# EAGLE board PCB (EAGLE 9.7.0)
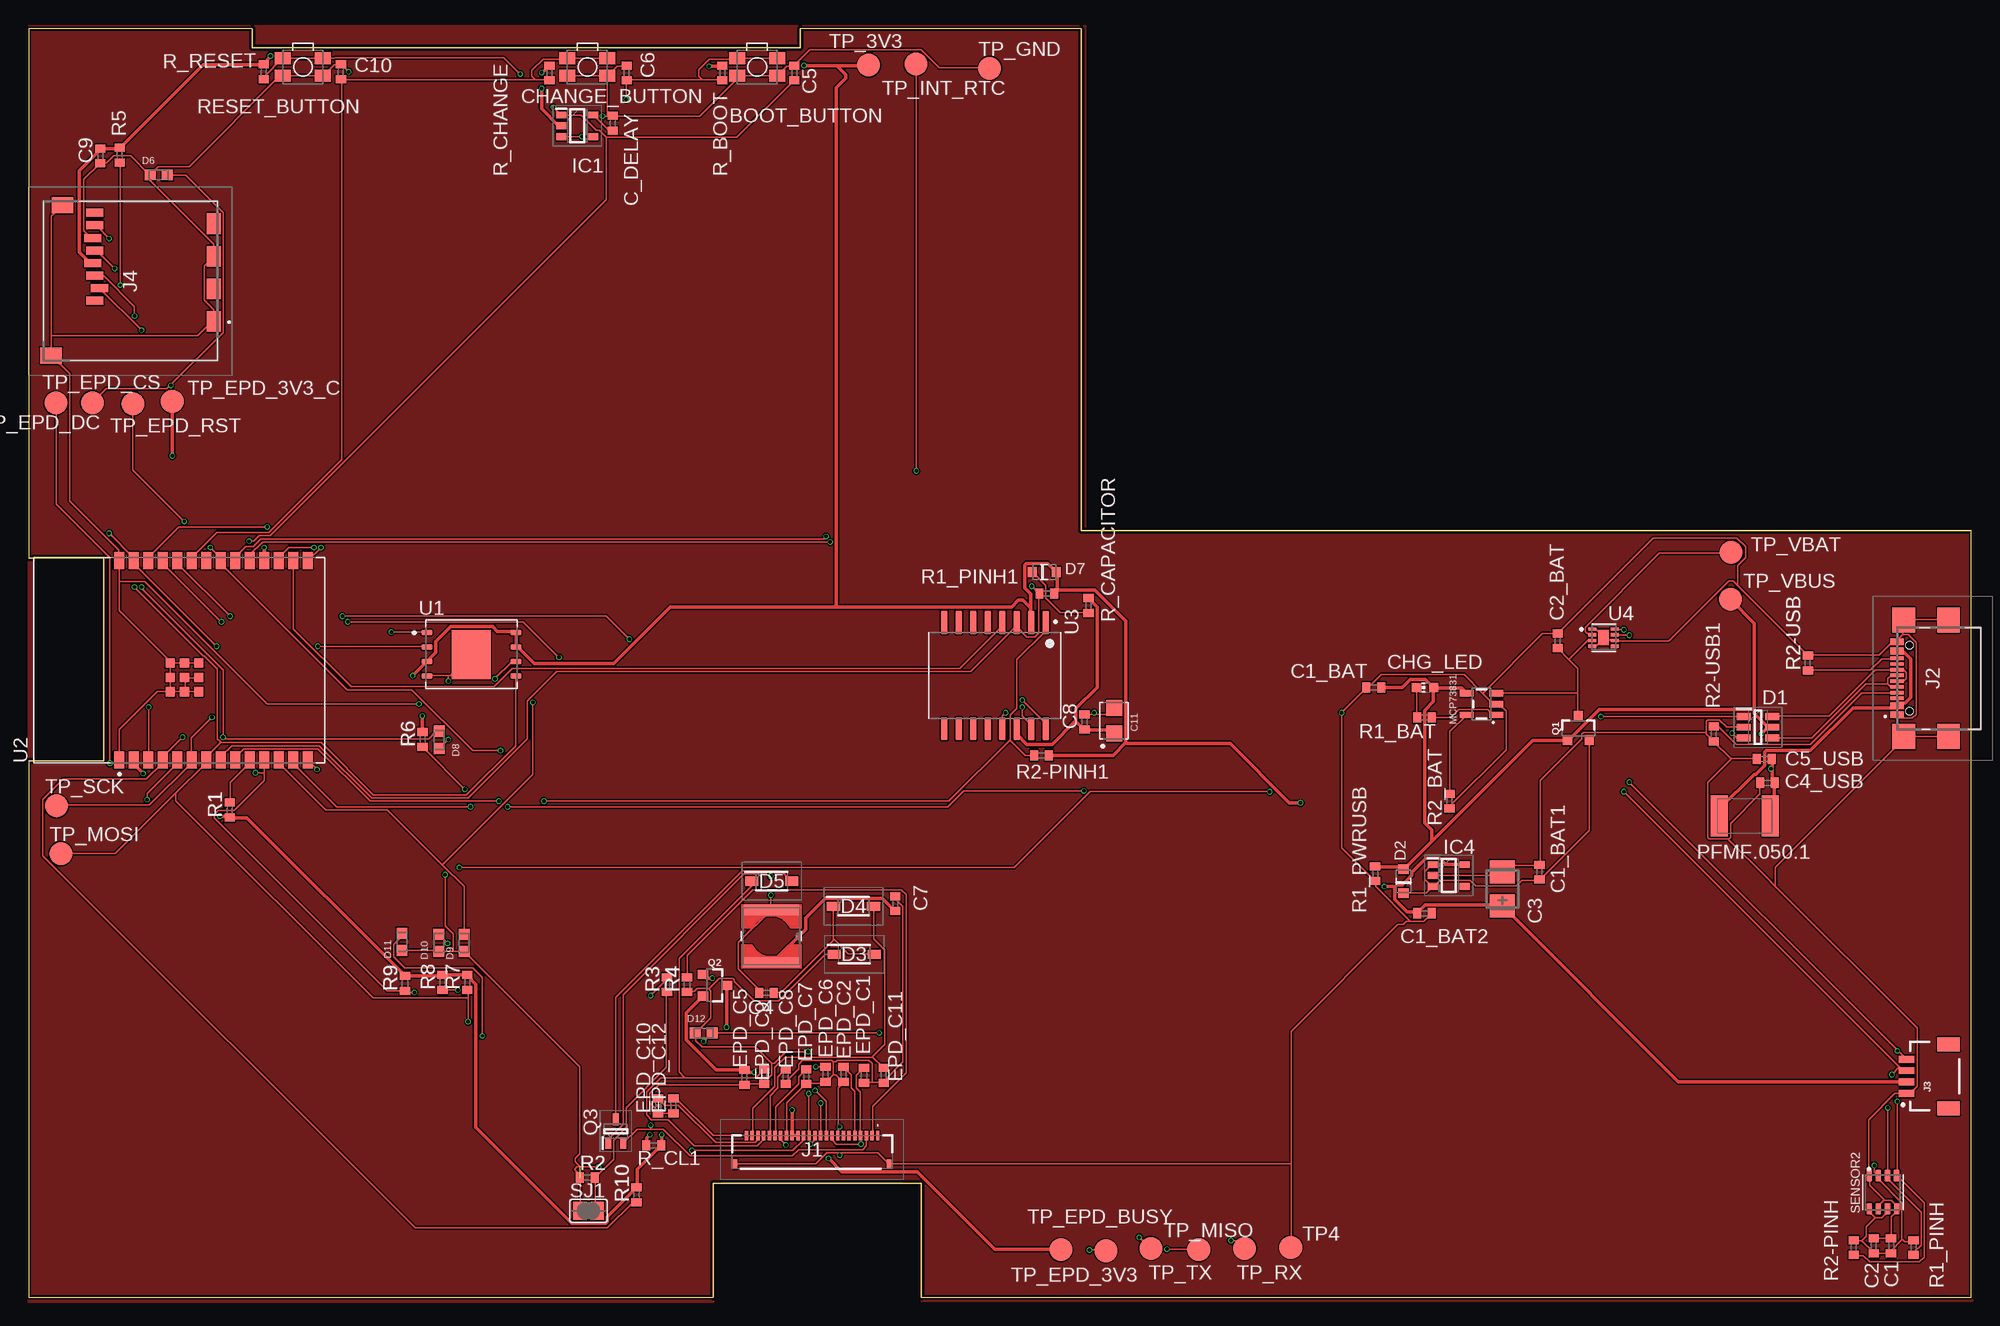
[diagram p0: board, top side]
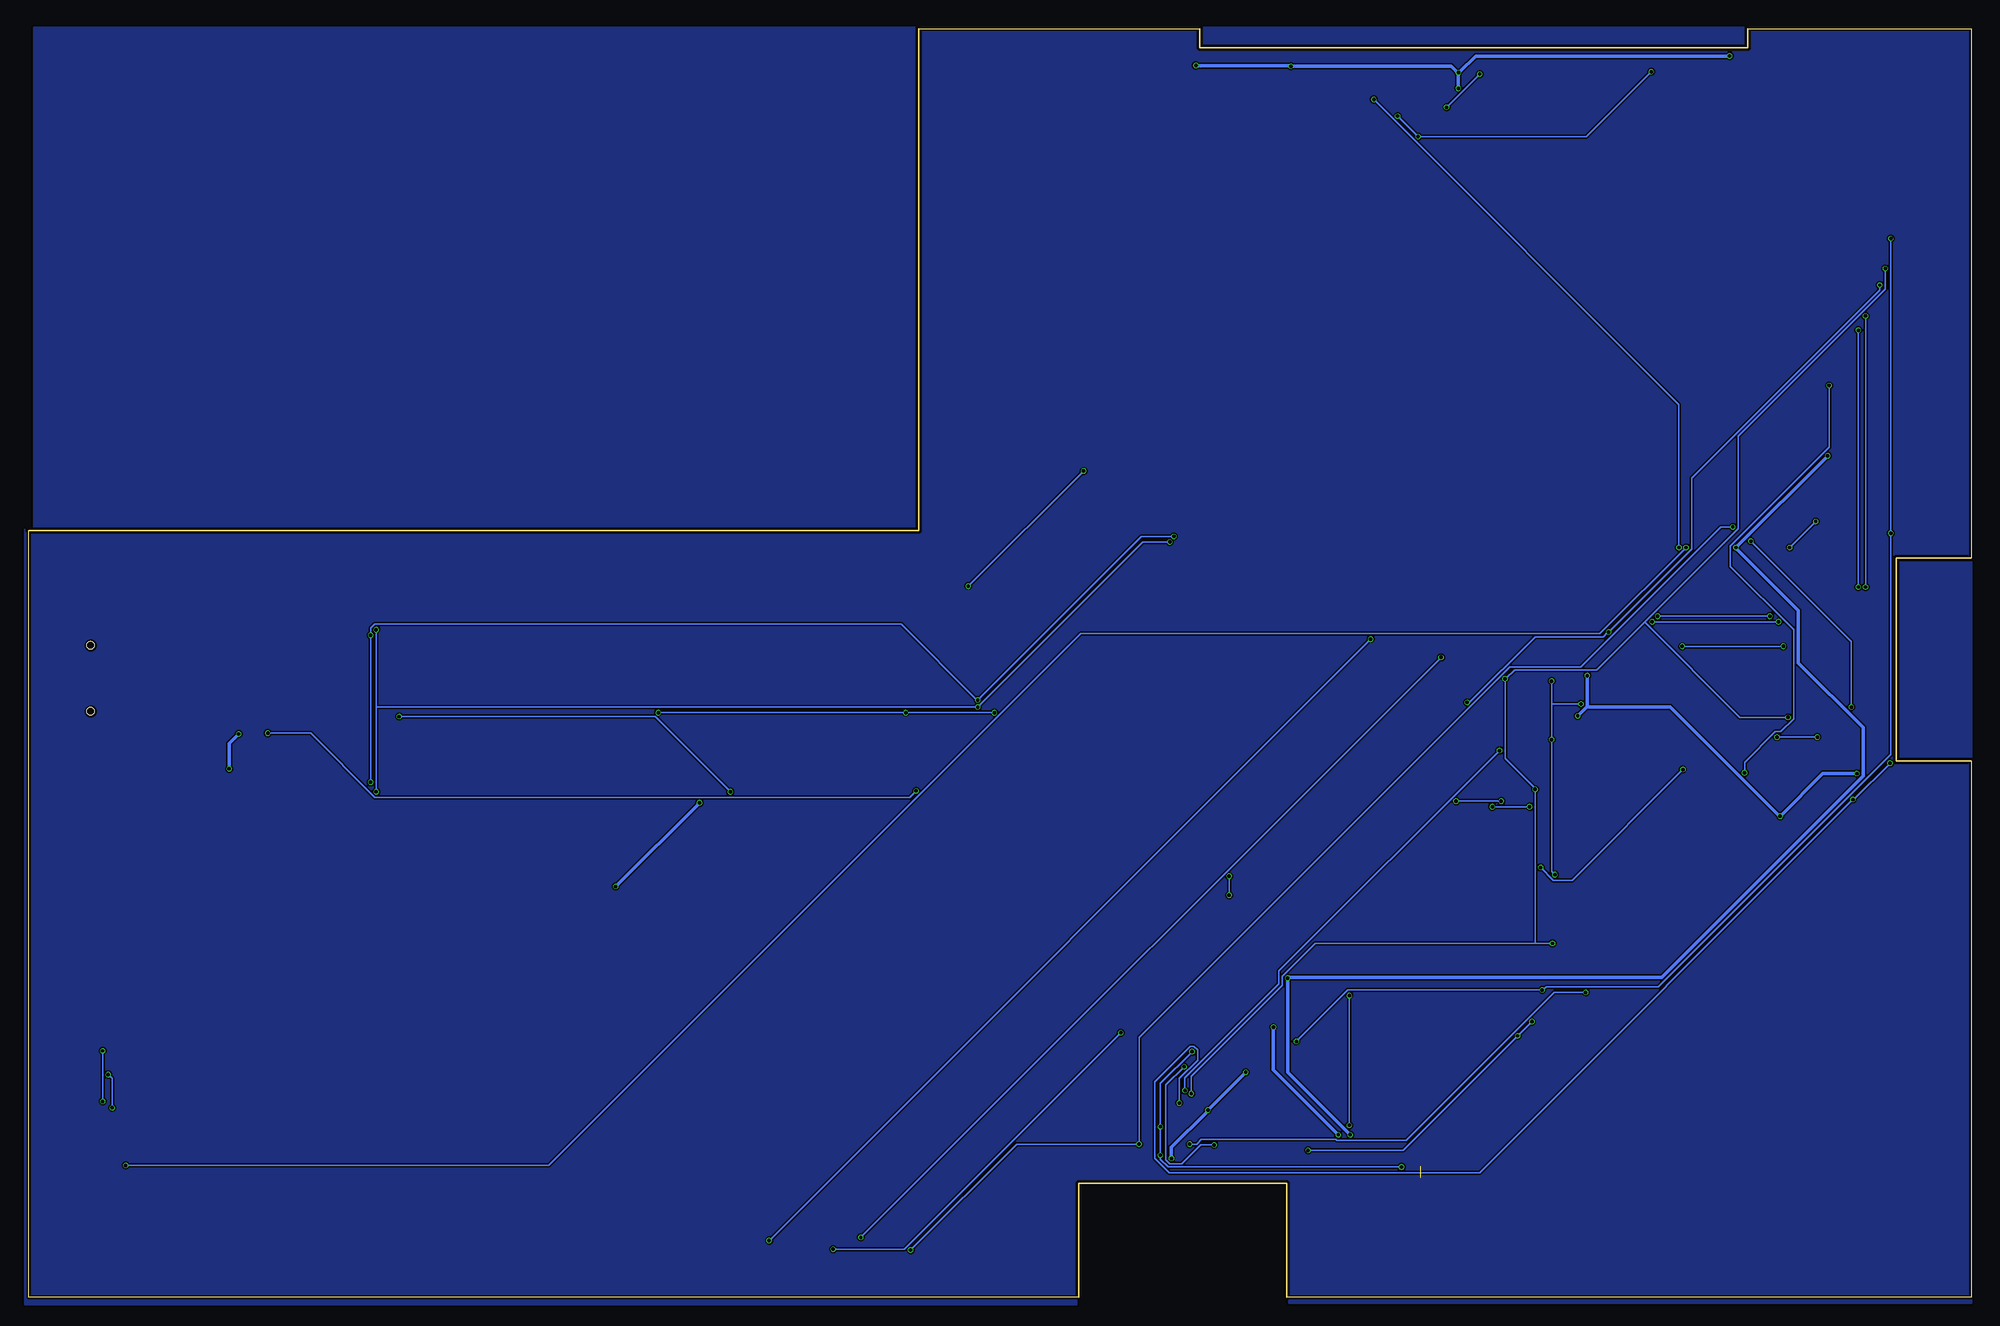
[diagram p1: board, bottom side, seen from below]

Size 170.2 x 111.2 mm. Coordinates in mm from the lower left corner, seen from the top.
Outline: 0,0 60,0 60,10 78.2,10 78.2,0 170.2,0 170.2,67.2 92.2,67.2 92.2,111.2 67.6,111.2 67.6,109.5 19.6,109.5 19.6,111.2 0,111.2 0,64.8 6.6,64.8 6.6,47 0,47 0,0
Copper layers (1*16): Top 0.035mm / dielectric 1.6mm / Bottom 0.035mm
Design rules "jlcpcb-2layers.dru": minimum track width 0.15mm, minimum drill 0.3mm, track to track 5mil, track to pad 5mil, pad to pad 5mil, via to via 5mil, smd to smd 5mil, copper to edge 0.2mm, drill to drill 6mil, minimum pad ring 10mil, minimum via ring 3mil, stop-mask expansion 4mil, vias tented up to drill 0mil, thermal gap 10mil
Net classes: 0 default: width 0.15 mm; 1 POWER: width 0.3 mm

## Footprints (pad centres in the part's own frame; a part is rotated, then mirrored left to right if it is on the bottom)
MYBUTTON = smd 1.4 x 1.05: 1 1.75,0.75; 2 -1.75,0.75; 3 -1.75,-0.75; 4 1.75,-0.75
EAGLE-LTSPICE_C0402 = smd 0.7 x 0.9: 1 -0.65,0; 2 0.65,0
ESP32_WROVER_EAGLE-LTSPICE_C0402 = smd 0.7 x 0.9: 1 -0.65,0; 2 0.65,0
RCL_CT3528 = smd 2 x 2.2: + -1.5,0; - 1.5,0
CAPCP3225X100N = smd 1.4 x 1.4: 1 -1.1,0; 2 1.1,0
ADAFRUIT_CHIP-LED0603 = smd 0.8 x 0.8: A 0,-0.75; C 0,0.75
SOT95P280X145-6N = smd 1.2 x 0.6: 1 -1.25,0.95; 2 -1.25,0; 3 -1.25,-0.95; 4 1.25,-0.95; 5 1.25,0; 6 1.25,0.95
ESP32_WROVER_AVX---SD0805S020S1R0_AVX_SD0805S020S1R0_0 = smd 0.8 x 0.9: 1 -1.05,0; 2 1.05,0
SOD3716X135N = smd 1.15 x 0.8: 1 -1.75,0; 2 1.75,0
DIOC1608X36N = smd 0.97 x 0.94: 1 -0.75,0; 2 0.75,0
SOT95P280X125-5N = smd 0.9 x 0.6: 1 -1.4,0.95; 2 -1.4,0; 3 -1.4,-0.95; 4 1.4,-0.95; 5 1.4,0.95
SOT95P280X120-5N = smd 0.9 x 0.6: 1 -1.4,0.95; 2 -1.4,0; 3 -1.4,-0.95; 4 1.4,-0.95; 5 1.4,0.95
FH34SRJ24S05SH99 = smd 0.3 x 0.8: 1 5.75,1.45; 2 5.25,1.45; 3 4.75,1.45; 4 4.25,1.45; 5 3.75,1.45; 6 3.25,1.45; 7 2.75,1.45; 8 2.25,1.45; 9 1.75,1.45; 10 1.25,1.45; 11 0.75,1.45; 12 0.25,1.45; 13 -0.25,1.45; 14 -0.75,1.45; 15 -1.25,1.45; 16 -1.75,1.45; 17 -2.25,1.45; 18 -2.75,1.45; 19 -3.25,1.45; 20 -3.75,1.45; 21 -4.25,1.45; 22 -4.75,1.45; 23 -5.25,1.45; 24 -5.75,1.45 | smd 0.4 x 0.8: MP1 6.75,-1.05; MP2 -6.75,-1.05
SAMACSYS_PARTS_USB4110GFA = smd 0.3 x 1.15: A1 -3.35,3.678; A4 -2.55,3.678; A5 -1.25,3.678; A6 -0.25,3.678; A7 0.25,3.678; A8 1.25,3.678; A9 2.55,3.678; A12 3.35,3.678; B1 3.05,3.678; B4 2.25,3.678; B5 1.75,3.678; B6 0.75,3.678; B7 -0.75,3.678; B8 -1.75,3.678; B9 -2.25,3.678; B12 -3.05,3.678 | smd 2.18 x 2: MP1 -5.11,-0.827; MP2 5.11,-0.827; MP3 -5.11,3.103; MP4 5.11,3.103 | hole 0.65: -2.89,2.603; 2.89,2.603
JST04_1MM_RA = smd 0.6 x 1.35: 1 -1.5,0; 2 -0.5,0; 3 0.5,0; 4 1.5,0 | smd 1.2 x 2: NC1 2.8,-3.675; NC2 -2.8,-3.675
112ATAARR03ATTEND = smd 1.8 x 1.2: G1 10.6,10.4; G2 4.9,10.4; S1 7.75,10.4; S2 2.05,10.4 | smd 1.4 x 1.9: G3 13.6,-3.85; G4 0.45,-2.85 | smd 0.7 x 1.5: P1 8.8,0; P2 7.7,0.4; P3 6.6,0; P4 5.5,-0.2; P5 4.4,0; P6 3.3,-0.2; P7 2.2,0; P8 1.1,0
IND_4828-WE-TPC_WRE = smd 0.889 x 4.826: 1 -2.286,0 | smd 0.889 x 4.953: 2 2.286,0
ESP32_WROVER_SPARKFUN-IC-POWER_SOT23-5 = smd 0.55 x 1.2: 1 -0.95,-1.3; 2 0,-1.3; 3 0.95,-1.3; 4 0.95,1.3; 5 -0.95,1.3
ESP32C6_VARISTOR_CT/CN1812 = smd 1.5 x 3.6: 1 -2.25,0; 2 2.25,0
ESP32_WROVER_SPARKFUN-DISCRETESEMI_SOT23-3 = smd 0.8 x 0.9: 1 -0.95,-1; 2 0.95,-1; 3 0,1.1
SOT65P210X110-3N = smd 1.05 x 0.5: 1 -1.05,0.65; 2 -1.05,-0.65; 3 1.05,0
ESP32_WROVER_EAGLE-LTSPICE_R0402 = smd 0.7 x 0.9: 1 -0.65,0; 2 0.65,0
ESP32_WROVER_BME680_PSON80P300X300X100-8N = smd 1.016 x 0.5: 1 1.458,1.2; 2 1.458,0.4; 3 1.458,-0.4; 4 1.458,-1.2; 5 -1.458,-1.22; 6 -1.458,-0.4; 7 -1.458,0.4; 8 -1.458,1.2
SJ = smd 1.168 x 1.6: 1 -0.762,0; 2 0.762,0
TP20R = smd 2 x 2: TP 0,0
SON127P600X800X80-9N = smd 0.94 x 0.44: 1 -3.895,1.905; 2 -3.895,0.635; 3 -3.895,-0.635; 4 -3.895,-1.905; 5 3.895,-1.905; 6 3.895,-0.635; 7 3.895,0.635; 8 3.895,1.905 | smd 3.4 x 4.3: 9 0,0
XCVR_ESP32-C6-WROOM-1-N8 = smd 1.5 x 0.9: 1 -8.75,5.26; 2 -8.75,3.99; 3 -8.75,2.72; 4 -8.75,1.45; 5 -8.75,0.18; 6 -8.75,-1.09; 7 -8.75,-2.36; 8 -8.75,-3.63; 9 -8.75,-4.9; 10 -8.75,-6.17; 11 -8.75,-7.44; 12 -8.75,-8.71; 13 -8.75,-9.98; 14 -8.75,-11.25; 15 8.75,-11.25; 16 8.75,-9.98; 17 8.75,-8.71; 18 8.75,-7.44; 19 8.75,-6.17; 20 8.75,-4.9; 21 8.75,-3.63; 22 8.75,-2.36; 23 8.75,-1.09; 24 8.75,0.18; 25 8.75,1.45; 26 8.75,2.72; 27 8.75,3.99; 28 8.75,5.26 | smd 0.8 x 0.8: 29_1 -2.755,0.79; 29_2 -1.505,0.79; 29_3 -0.255,0.79; 29_4 -2.755,-0.46; 29_5 -1.505,-0.46; 29_6 -0.255,-0.46; 29_7 -2.755,-1.71; 29_8 -1.505,-1.71; 29_9 -0.255,-1.71
SOIC127P1032X265-16N = smd 2.05 x 0.59: 1 -4.655,4.445; 2 -4.655,3.175; 3 -4.655,1.905; 4 -4.655,0.635; 5 -4.655,-0.635; 6 -4.655,-1.905; 7 -4.655,-3.175; 8 -4.655,-4.445; 9 4.655,-4.445; 10 4.655,-3.175; 11 4.655,-1.905; 12 4.655,-0.635; 13 4.655,0.635; 14 4.655,1.905; 15 4.655,3.175; 16 4.655,4.445
SON50P200X200X80-9N = smd 0.76 x 0.27: 1 -0.985,0.75; 2 -0.985,0.25; 3 -0.985,-0.25; 4 -0.985,-0.75; 5 0.985,-0.75; 6 0.985,-0.25; 7 0.985,0.25; 8 0.985,0.75 | smd 0.9 x 1.3: 9 0,0

## Placement (x,y rotation side)
BOOT_BUTTON  BUTTON_CUSYOMV1  [MYBUTTON]  63.83,107.83 180 top
C1  100nF  [EAGLE-LTSPICE_C0402]  163.16,4.53 90 top
C1_BAT  4.7uF  [EAGLE-LTSPICE_C0402]  117.85,53.45 180 top
C1_BAT1  4.7uF  [ESP32_WROVER_EAGLE-LTSPICE_C0402]  132.35,37.27 90 top
C1_BAT2  4.7uF  [ESP32_WROVER_EAGLE-LTSPICE_C0402]  122.29,33.67 0 top
C2  100nF  [EAGLE-LTSPICE_C0402]  161.64,4.53 90 top
C2_BAT  4.7uF  [EAGLE-LTSPICE_C0402]  133.96,57.55 90 top
C3  100uF TANT  [RCL_CT3528]  129.11,35.8 90 top
C4  4.7uF/25V  [EAGLE-LTSPICE_C0402]  64.65,26.69 180 top
C4_USB  100nF  [EAGLE-LTSPICE_C0402]  152.33,45.1 180 top
C5  1uF  [EAGLE-LTSPICE_C0402]  67.08,107.31 90 top
C5_USB  4.7uF  [EAGLE-LTSPICE_C0402]  152.05,47.18 180 top
C6  100nF  [EAGLE-LTSPICE_C0402]  52.41,107.31 90 top
C7  10uF  [EAGLE-LTSPICE_C0402]  75.92,34.51 90 top
C8  100nF  [EAGLE-LTSPICE_C0402]  92.5,50.43 90 top
C9  100nF  [EAGLE-LTSPICE_C0402]  6.28,100.03 90 top
C10  100nF  [EAGLE-LTSPICE_C0402]  27.36,107.41 90 top
C11  CPH3225A  [CAPCP3225X100N]  95.1,50.54 90 top
C_DELAY  100nF  [EAGLE-LTSPICE_C0402]  51.17,102.89 90 top
CHANGE_BUTTON  BUTTON_CUSYOMV1  [MYBUTTON]  48.96,107.83 180 top
CHG_LED  [ADAFRUIT_CHIP-LED0603]  122.34,53.45 90 top
D1  USBLC6-2SC6Y  [SOT95P280X145-6N]  151.5,49.97 0 top
D2  ESP32_WROVER_AVX---SD0805S020S1R0_AVX_SD0805S020S1R0_0_0AVX_SD0805S020S1R0_0_0  [ESP32_WROVER_AVX---SD0805S020S1R0_AVX_SD0805S020S1R0_0]  120.44,36.48 90 top
D3  MBR0530  [SOD3716X135N]  72.33,30.08 0 top
D4  MBR0530  [SOD3716X135N]  72.27,34.28 0 top
D5  MBR0530  [SOD3716X135N]  65.11,36.48 0 top
D6  PGB1010603MR  [DIOC1608X36N]  11.4,98.37 0 top
D7  ESP32_WROVER_AVX---SD0805S020S1R0_AVX_SD0805S020S1R0_0_0AVX_SD0805S020S1R0_0_0  [ESP32_WROVER_AVX---SD0805S020S1R0_AVX_SD0805S020S1R0_0]  88.99,63.58 0 top
D8  PGB1010603MR  [DIOC1608X36N]  35.98,48.87 90 top
D9  PGB1010603MR  [DIOC1608X36N]  38.16,31.07 90 top
D10  PGB1010603MR  [DIOC1608X36N]  35.94,31.07 90 top
D11  PGB1010603MR  [DIOC1608X36N]  32.72,31.17 90 top
D12  PGB1010603MR  [DIOC1608X36N]  59.15,23.18 0 top
EPD_C1  1uF/50V  [EAGLE-LTSPICE_C0402]  73.19,19.45 90 top
EPD_C2  1uF/50V  [EAGLE-LTSPICE_C0402]  71.4,19.55 90 top
EPD_C5  0.1uF/50v  [EAGLE-LTSPICE_C0402]  62.71,19.29 90 top
EPD_C6  1uF/50V  [EAGLE-LTSPICE_C0402]  69.81,19.55 90 top
EPD_C7  1uF/50V  [EAGLE-LTSPICE_C0402]  68.12,19.35 90 top
EPD_C8  1uF/50V  [EAGLE-LTSPICE_C0402]  66.33,19.35 90 top
EPD_C9  1uF/50V  [EAGLE-LTSPICE_C0402]  64.44,19.35 90 top
EPD_C10  1uF/50V  [EAGLE-LTSPICE_C0402]  55.15,16.79 90 top
EPD_C11  1uF/50V  [EAGLE-LTSPICE_C0402]  74.91,19.47 90 top
EPD_C12  1uF/50V  [EAGLE-LTSPICE_C0402]  56.49,16.79 90 top
IC1  BD5229G-TR  [SOT95P280X125-5N]  48.07,102.67 0 top
IC4  XC6220A331MR-G  [SOT95P280X120-5N]  124.41,36.97 0 top
J1  FH34SRJ-24S-0.5SH_99_  [FH34SRJ24S05SH99]  68.64,12.74 0 top
J2  SAMACSYS_PARTS_USB4110-GF-A  [SAMACSYS_PARTS_USB4110GFA]  167.36,54.26 90 top
J3  QWIIC_RIGHT_ANGLE  [JST04_1MM_RA]  164.51,19.38 90 top
J4  112A-TAAR-R03_ATTEND  [112ATAARR03ATTEND]  5.82,96.15 270 top
L1  68uH  [IND_4828-WE-TPC_WRE]  65.07,31.65 270 top
MCP73831  ESP32_WROVER_SPARKFUN-IC-POWER_MCP73831  [ESP32_WROVER_SPARKFUN-IC-POWER_SOT23-5]  127.28,51.99 90 top
PFMF.050.1  ESP32C6_VARISTORCN1812  [ESP32C6_VARISTOR_CT/CN1812]  150.34,42.2 0 top
Q1  20V/4.2A/52mΩ/1.4W  [ESP32_WROVER_SPARKFUN-DISCRETESEMI_SOT23-3]  135.76,49.86 0 top
Q2  20V/4.2A/52mΩ/1.4W  [ESP32_WROVER_SPARKFUN-DISCRETESEMI_SOT23-3]  60.08,27.36 270 top
Q3  SI1308EDL-T1-GE3  [SOT65P210X110-3N]  51.44,14.58 90 top
R1  10k  [ESP32_WROVER_EAGLE-LTSPICE_R0402]  17.62,42.71 90 top
R1_BAT  200  [ESP32_WROVER_EAGLE-LTSPICE_R0402]  122.28,50.83 0 top
R1_PINH  10K  [ESP32_WROVER_EAGLE-LTSPICE_R0402]  165.13,4.37 90 top
R1_PINH1  10K  [ESP32_WROVER_EAGLE-LTSPICE_R0402]  89.21,61.69 0 top
R1_PWRUSB  100K  [ESP32_WROVER_EAGLE-LTSPICE_R0402]  117.96,37.14 90 top
R2  2.2  [ESP32_WROVER_EAGLE-LTSPICE_R0402]  48.94,10.51 0 top
R2-PINH  10K  [ESP32_WROVER_EAGLE-LTSPICE_R0402]  159.89,4.37 90 top
R2-PINH1  10K  [ESP32_WROVER_EAGLE-LTSPICE_R0402]  88.73,47.49 0 top
R2-USB  5k1  [ESP32_WROVER_EAGLE-LTSPICE_R0402]  155.87,55.6 90 top
R2-USB1  5K1  [ESP32_WROVER_EAGLE-LTSPICE_R0402]  147.63,49.37 90 top
R2_BAT  2K  [ESP32_WROVER_EAGLE-LTSPICE_R0402]  124.47,43.49 90 top
R3  0.47  [ESP32_WROVER_EAGLE-LTSPICE_R0402]  55.94,27.41 90 top
R4  10K  [ESP32_WROVER_EAGLE-LTSPICE_R0402]  57.68,27.41 90 top
R5  10K  [ESP32_WROVER_EAGLE-LTSPICE_R0402]  8,100.11 90 top
R6  10K  [ESP32_WROVER_EAGLE-LTSPICE_R0402]  34.52,48.91 90 top
R7  10K  [ESP32_WROVER_EAGLE-LTSPICE_R0402]  38.44,27.61 90 top
R8  10K  [ESP32_WROVER_EAGLE-LTSPICE_R0402]  36.26,27.61 90 top
R9  10K  [ESP32_WROVER_EAGLE-LTSPICE_R0402]  32.98,27.51 90 top
R10  10K  [ESP32_WROVER_EAGLE-LTSPICE_R0402]  53.26,9.01 90 top
R_BOOT  10k  [ESP32_WROVER_EAGLE-LTSPICE_R0402]  60.78,107.31 90 top
R_CAPACITOR  15  [ESP32_WROVER_EAGLE-LTSPICE_R0402]  92.86,60.64 90 top
R_CHANGE  10k  [ESP32_WROVER_EAGLE-LTSPICE_R0402]  45.63,107.31 90 top
R_CL1  10K  [ESP32_WROVER_EAGLE-LTSPICE_R0402]  54.78,13.33 0 top
R_RESET  10k  [ESP32_WROVER_EAGLE-LTSPICE_R0402]  20.6,107.41 90 top
RESET_BUTTON  BUTTON_CUSYOMV1  [MYBUTTON]  24.04,107.83 180 top
SENSOR2  ESP32_WROVER_BME680_BME680  [ESP32_WROVER_BME680_PSON80P300X300X100-8N]  162.44,9.22 90 top
SJ1  [SJ]  49.06,7.59 0 top
TP4  TPTP20R  [TP20R]  110.57,4.39 0 top
TP_3V3  TPTP20R  [TP20R]  73.59,107.99 0 top
TP_EPD_3V3  TPTP20R  [TP20R]  90.44,4.19 0 top
TP_EPD_3V3_C  TPTP20R  [TP20R]  12.59,78.51 0 top
TP_EPD_BUSY  TPTP20R  [TP20R]  94.37,4.09 0 top
TP_EPD_CS  TPTP20R  [TP20R]  5.59,78.41 0 top
TP_EPD_DC  TPTP20R  [TP20R]  2.39,78.39 0 top
TP_EPD_RST  TPTP20R  [TP20R]  9.14,78.31 0 top
TP_GND  TPTP20R  [TP20R]  84.19,107.71 0 top
TP_INT_RTC  TPTP20R  [TP20R]  77.74,108.09 0 top
TP_MISO  TPTP20R  [TP20R]  102.51,4.19 0 top
TP_MOSI  TPTP20R  [TP20R]  2.83,38.89 0 top
TP_RX  TPTP20R  [TP20R]  106.53,4.29 0 top
TP_SCK  TPTP20R  [TP20R]  2.45,43.09 0 top
TP_TX  TPTP20R  [TP20R]  98.31,4.29 0 top
TP_VBAT  TPTP20R  [TP20R]  149.15,65.29 0 top
TP_VBUS  TPTP20R  [TP20R]  149.09,61.19 0 top
U1  W25Q512JVEIQ  [SON127P600X800X80-9N]  38.79,56.36 0 top
U2  ESP32-C6-WROOM-1-N8  [XCVR_ESP32-C6-WROOM-1-N8]  13.2,55.84 90 top
U3  DS3231SN#  [SOIC127P1032X265-16N]  84.65,54.5 270 top
U4  MAX17048G+T10  [SON50P200X200X80-9N]  137.97,57.82 0 top

## Library data of the parts
BOOT_BUTTON CHANGE_BUTTON CHG_LED PFMF.050.1 RESET_BUTTON SJ1 TP4 TP_3V3 TP_EPD_3V3 TP_EPD_3V3_C TP_EPD_BUSY TP_EPD_CS TP_EPD_DC TP_EPD_RST TP_GND TP_INT_RTC TP_MISO TP_MOSI TP_RX TP_SCK TP_TX TP_VBAT TP_VBUS = DeskAssistant_v19_v1
C1 C1_BAT C1_BAT1 C1_BAT2 C2 C2_BAT C4 C4_USB C5 C5_USB C6-C10 C_DELAY EPD_C1 EPD_C2 EPD_C5-EPD_C12 = DeskAssistant_v19_v1; SPICEMODEL: NONE; SPICEPREFIX: C
C3 = DeskAssistant_v19_v1; SPICEPREFIX: C
C11 = DeskAssistant_v19_v1; AVAILABILITY: Not in stock; CHECK_PRICES: https://www.snapeda.com/parts/CPH3225A/Seiko+Instruments/view-part/?ref=eda; DESCRIPTION: 11 mF (EDLC) Supercapacitor 3.3 V 1210 (3225 Metric) - -; MF: Seiko Instruments; MP: CPH3225A; PACKAGE: 1210 Seiko; PRICE: None; PURCHASE-URL: https://www.snapeda.com/api/url_track_click_mouser/?unipart_id=562593&manufacturer=Seiko Instruments&part_name=CPH3225A&search_term=None; SNAPEDA_LINK: https://www.snapeda.com/parts/CPH3225A/Seiko+Instruments/view-part/?ref=snap
D1 = DeskAssistant_v19_v1; AVAILABILITY: In Stock; CHECK_PRICES: https://www.snapeda.com/parts/USBLC6-2SC6Y/STMicroelectronics/view-part/?ref=eda; DESCRIPTION: 17V Clamp 5A (8/20µs) Ipp Tvs Diode Surface Mount SOT-23-6; MF: STMicroelectronics; MP: USBLC6-2SC6Y; PACKAGE: SOT-23-6 STMicroelectronics; PRICE: None; SNAPEDA_LINK: https://www.snapeda.com/parts/USBLC6-2SC6Y/STMicroelectronics/view-part/?ref=snap
D2 D7 = DeskAssistant_v19_v1; CENTROID_NOT_SPECIFIED: No; DATASHEET: http://datasheets.avx.com/schottky.pdf; DIGIKEY_DESCRIPTION: DIODE SCHOTTKY 20V 1A 0805; DIGIKEY_PART_NUMBER: 478-7800-1-ND; LEAD_FREE: yes; MF: AVX; MOUSER_PART_NUMBER: 581-SD0805S020S1R0; PACKAGE: 0805 (2012 metric); PREFIX: D; ROHS: yes; TEMPERATURE_RANGE_HIGH: +125°C; TEMPERATURE_RANGE_LOW: -55°C
D3-D5 = DeskAssistant_v19_v1; AVAILABILITY: In Stock; CHECK_PRICES: https://www.snapeda.com/parts/MBR0530/Onsemi/view-part/?ref=eda; DESCRIPTION: Diode Schottky 30 V 500mA Surface Mount SOD-123; MF: ON Semiconductor; MP: MBR0530; PACKAGE: SOD-123-2 ON Semiconductor; PRICE: None; PURCHASE-URL: https://www.snapeda.com/api/url_track_click_mouser/?unipart_id=179458&manufacturer=ON Semiconductor&part_name=MBR0530&search_term=None; SNAPEDA_LINK: https://www.snapeda.com/parts/MBR0530/Onsemi/view-part/?ref=snap
D6 D8-D12 = DeskAssistant_v19_v1; AVAILABILITY: In Stock; CHECK_PRICES: https://www.snapeda.com/parts/PGB1010603MR/Littelfuse/view-part/?ref=eda; DESCRIPTION: 150V (Typ) Clamp - Ipp Tvs Diode Surface Mount 0603 (1608 Metric); MF: Littelfuse Inc.; MP: PGB1010603MR; PACKAGE: 0603 Littelfuse Inc.; PRICE: None; PURCHASE-URL: https://www.snapeda.com/api/url_track_click_mouser/?unipart_id=5659453&manufacturer=Littelfuse Inc.&part_name=PGB1010603MR&search_term=None; SNAPEDA_LINK: https://www.snapeda.com/parts/PGB1010603MR/Littelfuse/view-part/?ref=snap
IC1 = DeskAssistant_v19_v1; DESCRIPTION: Voltage Detector with Adjustable Delay Time: CMOS processes are utilized to develop high precision, low current consumption CMOS reset ICs that allow arbitrary setting of the delay time. The extensive lineup includes both Nch Open Drain and CMOS output types in a wide range of detection voltages (from 2.3V to 6.0V, in 0.1V steps), enabling selection of the ideal solution based on customer requirements. In addition, the entire series is of course both lead-free and RoHS-compliant.; HEIGHT: 1.25mm; MANUFACTURER_NAME: ROHM Semiconductor; MANUFACTURER_PART_NUMBER: BD5229G-TR; MOUSER_PART_NUMBER: 755-BD5229G-TR; MOUSER_PRICE-STOCK: https://www.mouser.co.uk/ProductDetail/ROHM-Semiconductor/BD5229G-TR?qs=4kLU8WoGk0vvnhrrYwdszw%3D%3D
IC4 = DeskAssistant_v19_v1; DESCRIPTION: LDO Voltage Regulators; HEIGHT: 1.2mm; MANUFACTURER_NAME: Torex; MANUFACTURER_PART_NUMBER: XC6220A331MR-G; MOUSER_PART_NUMBER: 865-XC6220A331MR-G; MOUSER_PRICE-STOCK: https://www.mouser.co.uk/ProductDetail/Torex-Semiconductor/XC6220A331MR-G?qs=AsjdqWjXhJ8ZSWznL1J0gg%3D%3D
J1 = DeskAssistant_v19_v1; DESCRIPTION: 24 Position FFC, FPC Connector Contacts, Top and Bottom 0.020" (0.50mm) Surface Mount, Right Angle; HEIGHT: 1.1mm; MANUFACTURER_NAME: Hirose; MANUFACTURER_PART_NUMBER: FH34SRJ-24S-0.5SH(99); MOUSER_PART_NUMBER: 798-FH34SRJ24S05SH99; MOUSER_PRICE-STOCK: https://www.mouser.co.uk/ProductDetail/Hirose-Connector/FH34SRJ-24S-0.5SH99?qs=vcbW%252B4%252BSTIpKBl5ap9J8Fw%3D%3D
J2 = DeskAssistant_v19_v1; DESCRIPTION: CONN USB 2.0 TYPE-C R/A SMT; HEIGHT: 3.26mm; MANUFACTURER_NAME: GCT (GLOBAL CONNECTOR TECHNOLOGY); MANUFACTURER_PART_NUMBER: USB4110-GF-A; MOUSER_PART_NUMBER: 640-USB4110-GF-A; MOUSER_PRICE-STOCK: https://www.mouser.co.uk/ProductDetail/GCT/USB4110-GF-A?qs=KUoIvG%2F9IlYiZvIXQjyJeA%3D%3D
J3 = DeskAssistant_v19_v1; PROD_ID: CONN-13694
J4 = DeskAssistant_v19_v1; DESCRIPTION: Micro SD Card Socket, Push-Push Type, Top Mount, SMT, H=1.83mm, 10u; HEIGHT: 1.9mm; MANUFACTURER_NAME: ATTEND; MANUFACTURER_PART_NUMBER: 112A-TAAR-R03 ATTEND
L1 = DeskAssistant_v19_v1; COPYRIGHT: Copyright (C) 2024 Ultra Librarian. All rights reserved.; MANUFACTURER_PART_NUMBER: 744043680; MFR_NAME: Wurth Electronics
MCP73831 = DeskAssistant_v19_v1; PROD_ID: IC-09995
Q1 Q2 = DeskAssistant_v19_v1; PROD_ID: TRAN-14388
Q3 = DeskAssistant_v19_v1; AVAILABILITY: In Stock; CHECK_PRICES: https://www.snapeda.com/parts/SI1308EDL-T1-GE3/Vishay+Siliconix/view-part/?ref=eda; DESCRIPTION: Si1308EDL-T1-GE3 N-channel MOSFET Transistor, 1.5 A, 30 V, 3-Pin SC-70 | Siliconix / Vishay SI1308EDL-T1-GE3; MF: Vishay Siliconix; MP: SI1308EDL-T1-GE3; PACKAGE: SOT-323 Vishay Semiconductor; PRICE: None; PURCHASE-URL: https://www.snapeda.com/api/url_track_click_mouser/?unipart_id=274603&manufacturer=Vishay Siliconix&part_name=SI1308EDL-T1-GE3&search_term=None; SNAPEDA_LINK: https://www.snapeda.com/parts/SI1308EDL-T1-GE3/Vishay+Siliconix/view-part/?ref=snap
R1 R1_BAT R1_PINH R1_PINH1 R1_PWRUSB R2 R2-PINH R2-PINH1 R2-USB R2_BAT R3-R10 R_BOOT R_CAPACITOR R_CHANGE R_CL1 R_RESET = DeskAssistant_v19_v1; SPICEMODEL: NONE; SPICEPREFIX: R
R2-USB1 = DeskAssistant_v19_v1; SPICEMODEL: NONE; SPICEPREFIX: R2-USB1
SENSOR2 = DeskAssistant_v19_v1; AVAILABILITY: Unavailable; DESCRIPTION: Integrated Environmental Unit; MF: Bosch Sensortec; MP: BME680; PACKAGE: LGA-8 Bosch Tools; PRICE: None
U1 = DeskAssistant_v19_v1; AVAILABILITY: In Stock; CHECK_PRICES: https://www.snapeda.com/parts/W25Q512JVEIQ/Winbond+Electronics/view-part/?ref=eda; DESCRIPTION: FLASH - NOR Memory IC 512Mb (64M x 8) SPI - Quad I/O 133 MHz 8-WSON (8x6); MF: Winbond Electronics; MP: W25Q512JVEIQ; PACKAGE: Package; PRICE: None; SNAPEDA_LINK: https://www.snapeda.com/parts/W25Q512JVEIQ/Winbond+Electronics/view-part/?ref=snap
U2 = DeskAssistant_v19_v1; AVAILABILITY: In Stock; CHECK_PRICES: https://www.snapeda.com/parts/ESP32-C6-WROOM-1-N8/Espressif+Systems/view-part/?ref=eda; DESCRIPTION: Multiprotocol Modules ESP32-C6 module, Wi-Fi 6 in 2.4 GHz band, Bluetooth 5, Zigbee 3.0 and Thread. ESP34-WROOM Compatible - ENGINEERING SAMPLE; MF: Espressif Systems; MP: ESP32-C6-WROOM-1-N8; PACKAGE: None; PRICE: None; SNAPEDA_LINK: https://www.snapeda.com/parts/ESP32-C6-WROOM-1-N8/Espressif+Systems/view-part/?ref=snap
U3 = DeskAssistant_v19_v1; AVAILABILITY: In Stock; CHECK_PRICES: https://www.snapeda.com/parts/DS3231SN%23/Analog+Devices/view-part/?ref=eda; DESCRIPTION: Extremely Accurate I²C-Integrated RTC/TCXO/Crystal; MF: Analog Devices; MP: DS3231SN#; PACKAGE: SOIC-16 Maxim; PRICE: None; PURCHASE-URL: https://www.snapeda.com/api/url_track_click_mouser/?unipart_id=99048&manufacturer=Analog Devices&part_name=DS3231SN#&search_term=None; SNAPEDA_LINK: https://www.snapeda.com/parts/DS3231SN%23/Analog+Devices/view-part/?ref=snap
U4 = DeskAssistant_v19_v1; AVAILABILITY: In Stock; CHECK_PRICES: https://www.snapeda.com/parts/MAX17048G+T10/Analog+Devices/view-part/?ref=eda; DESCRIPTION: 3µA 1-Cell/2-Cell Fuel Gauge with ModelGauge; MF: Analog Devices; MP: MAX17048G+T10; PACKAGE: TDFN-8 Maxim; PRICE: None; PURCHASE-URL: https://www.snapeda.com/api/url_track_click_mouser/?unipart_id=329239&manufacturer=Analog Devices&part_name=MAX17048G+T10&search_term=None; SNAPEDA_LINK: https://www.snapeda.com/parts/MAX17048G+T10/Analog+Devices/view-part/?ref=snap

## Nets
3V3 [POWER]: C1_BAT2.1 C3.+ C9.2 D7.2 IC1.2 IC4.5 J3.2 J4.P4 Q2.3 R1.1 R1_PINH1.2 R2-PINH1.2 R5.2 R6.2 R7.2 R8.2 R9.2 R10.2 R_BOOT.2 R_CHANGE.2 R_CL1.2 R_RESET.2 TP_3V3.TP U1.3 U1.7 U1.8 U2.2 U3.2
32KHZ: R2-PINH1.1 U2.9 U3.1
DN: D1.4 J2.A7 J2.B7
DP: D1.6 J2.A6 J2.B6
EDP_3V3 [POWER]: C7.1 L1.2
EPD_3V3 [POWER]: EPD_C5.2 J1.15 J1.16 Q2.2 TP_EPD_3V3.TP
EPD_3V3_C [POWER]: Q2.1 R_CL1.1 TP_EPD_3V3_C.TP U2.18
EPD_BUSY: J1.9 TP_EPD_BUSY.TP U2.26
EPD_CS: D6.2 J1.12 R9.1 TP_EPD_CS.TP U2.11
EPD_DC: J1.11 TP_EPD_DC.TP U2.5
EPD_RST: J1.10 TP_EPD_RST.TP U2.21
FLASH_CS: D9.2 R5.1 U1.1 U2.12
GDR: J1.2 Q3.1 R4.2
GND: BOOT_BUTTON.1 BOOT_BUTTON.2 C1.2 C1_BAT1.2 C1_BAT2.2 C1_BAT.2 C2.2 C2_BAT.2 C3.- C4_USB.2 C5.2 C5_USB.2 C6.2 C7.2 C8.2 C9.1 C10.2 C11.2 C_DELAY.2 CHANGE_BUTTON.1 CHANGE_BUTTON.2 D1.2 D3.1 D6.1 D8.1 D9.1 D10.1 D11.1 D12.1 EPD_C1.1 EPD_C2.1 EPD_C5.1 EPD_C6.1 EPD_C7.1 EPD_C8.1 EPD_C9.1 EPD_C10.1 EPD_C11.1 EPD_C12.1 IC1.3 IC4.2 J1.8 J1.17 J1.MP1 J1.MP2 J2.A1 J2.A12 J2.B1 J2.B12 J2.MP1 J2.MP2 J2.MP3 J2.MP4 J3.1 J4.G1 J4.G2 J4.G3 J4.G4 J4.P6 MCP73831.2 R1_PWRUSB.1 R2-USB1.1 R2-USB.2 R2.1 R2_BAT.1 R4.1 RESET_BUTTON.1 RESET_BUTTON.2 SENSOR2.1 SENSOR2.5 SENSOR2.7 SJ1.1 TP4.TP TP_GND.TP U1.4 U1.9 U2.1 U2.28 U2.29_1 U2.29_2 U2.29_3 U2.29_4 U2.29_5 U2.29_6 U2.29_7 U2.29_8 U2.29_9 U3.13 U4.1 U4.4 U4.6 U4.9
GPIO8: R1.2 U2.10
I2C_PW: C1.1 C2.1 R1_PINH.2 R2-PINH.2 SENSOR2.2 SENSOR2.6 SENSOR2.8 U2.17
INT_RTC: R1_PINH1.1 TP_INT_RTC.TP U2.8 U3.3
IO/BOOT: BOOT_BUTTON.3 BOOT_BUTTON.4 C6.1 R_BOOT.1 U2.15
IO/CHANGE: C10.1 CHANGE_BUTTON.3 CHANGE_BUTTON.4 R_CHANGE.1 U2.23
MISO: D12.2 J4.P7 R8.1 TP_MISO.TP U1.2 U2.27
MOSI: D11.2 J1.14 J4.P3 R7.1 TP_MOSI.TP U1.5 U2.7
N$1: C4.1 D3.2 D4.1
N$2: EPD_C12.2 J1.24
N$3: J2.A5 R2-USB1.2
N$4: J2.B5 R2-USB.1
N$6: C1_BAT1.1 D2.1 IC4.1 IC4.3 Q1.2
N$8: D7.1 R_CAPACITOR.1
N$9: EPD_C10.2 J1.22
N$11: EPD_C8.2 J1.20
N$12: EPD_C7.2 J1.19
N$13: EPD_C6.2 J1.18
N$15: EPD_C2.2 J1.5
N$16: C_DELAY.1 IC1.5
N$17: EPD_C1.2 J1.4
N$18: MCP73831.5 R2_BAT.2
N$20: CHG_LED.C R1_BAT.1
N$21: MCP73831.1 R1_BAT.2
PREVGH: D5.1 EPD_C9.2 J1.21
PREVGL: D4.2 EPD_C11.2 J1.23
RESE: J1.3 Q3.2 R3.2
RESE`: R2.2 R3.1 SJ1.2
RESET: C5.1 IC1.1 R_RESET.1 RESET_BUTTON.3 RESET_BUTTON.4 U2.3
RTC_RST: U2.16 U3.4
RX: TP_RX.TP U2.24
SCK: D10.2 J1.13 J4.P5 R6.1 TP_SCK.TP U1.6 U2.6
SCL: J3.4 R2-PINH.1 SENSOR2.4 U2.20 U3.16 U4.7
SDA: J3.3 R1_PINH.1 SENSOR2.3 U2.19 U3.15 U4.8
SRC: C4.2 D5.2 L1.1 Q3.3
SS_SD: D8.2 J4.P2 R10.1 U2.4
TX: TP_TX.TP U2.25
USB_D+: D1.1 U2.14
USB_D-: D1.3 U2.13
VBAT: C2_BAT.1 MCP73831.3 Q1.3 TP_VBAT.TP U4.2 U4.3
VBUS [POWER]: C1_BAT.1 C4_USB.1 C5_USB.1 CHG_LED.A D1.5 D2.2 MCP73831.4 PFMF.050.1.2 Q1.1 R1_PWRUSB.2 TP_VBUS.TP
VRTC [POWER]: C8.1 C11.1 R_CAPACITOR.2 U3.14
VUSB [POWER]: J2.A4 J2.A9 J2.B4 J2.B9 PFMF.050.1.1

## Tracks (layer width: path | path; a pad name or v marks a point on that pad's centre or on a via)
3V3  (via drill 0.3)
  Top 0.3: J4.P4 5.61,90.72 5.33,90.72 4.43,91.62 4.43,98.75 6.23,100.55 C9.2 6.3,100.69 7.89,100.69 7.96,100.76 R5.2 8.1,100.83 15.3,108.03 20.57,108.03 R_RESET.2 20.64,108.17 21.19,108.72 v21.19,108.79 | v44.94,107.34 45.01,107.34 45.57,107.89 R_CHANGE.2 | v44.94,105.95 44.94,104.15 46.4,102.7 46.6,102.7 IC1.2 | v59.62,107.89 60.73,107.89 R_BOOT.2 | v67.93,107.96 70.77,107.96 | 70.8,107.96 73.54,107.96 TP_3V3.TP | 70.77,107.96 70.8,107.96 | 119.66,35.94 119.87,36.15 120.36,36.15 121.19,36.98 121.19,37.26 122.43,38.5 123.61,38.5 124.17,37.95 125.76,37.95 IC4.5 | 119.66,35.94 119.66,34.9 120.77,33.8 121.53,33.8 C1_BAT2.1 121.67,33.73 122.36,34.42 129.01,34.42 129.08,34.35 C3.+ 129.22,34.21 144.53,18.91 164.47,18.91 J3.2 | v61.15,23.68 61.15,27.36 Q2.3 | v55.47,14.27 55.47,13.44 R_CL1.2 55.4,13.3 53.32,11.22 53.32,9.7 R10.2 53.18,9.56 50.69,7.06 50.69,6.65 50.55,6.51 47.58,6.51 39.2,14.89 39.2,27.42 38.5,28.12 R7.2 36.36,28.25 R8.2 36.22,28.25 36.15,28.19 33.03,28.19 R9.2 32.89,28.25 19.11,42.04 17.66,42.04 R1.1 17.52,42.17 v16.76,42.17 | 96.12,48.61 95.01,47.51 89.4,47.51 R2-PINH1.2 | 96.12,48.61 96.12,59.28 93.42,61.98 90.16,61.98 89.89,61.7 R1_PINH1.2 90.09,62.12 90.09,63.57 D7.2 89.96,63.64 89.26,64.33 87.39,64.33 87.25,64.2 87.25,62.19 87.81,61.63 87.81,60.4 | 87.81,60.4 87.81,59.21 U3.2 | v34.49,50.97 34.49,49.58 R6.2 | v33.66,54.5 34.83,55.68 U1.3 34.97,55.82 35.66,56.51 35.66,57.48 36.98,58.79 40.65,58.79 41.06,58.38 42.59,58.38 U1.8 42.73,58.24 42.73,57.06 U1.7 42.87,56.99 44.32,55.54 51.24,55.54 56.23,60.53 70.77,60.53 | v10.04,45.91 9.21,46.75 9.21,47.02 U2.2
  Top 0.3: 70.77,60.53 86.13,60.53 86.7,61.1 87.11,61.1 87.81,60.4 | v118.76,36.01 119.53,36.01 119.66,35.94 | v111.42,43.35 110.45,43.35 105.26,48.55 96.26,48.55 96.12,48.61 | 70.77,60.53 70.77,106 71.6,106.83 71.6,107.14 70.8,107.94 | 70.8,107.94 70.77,107.96 | 70.8,107.94 70.8,107.96
  Bottom 0.3: v44.94,105.95 v44.94,107.34 | v44.94,107.34 45.08,107.41 45.57,107.89 v59.62,107.89 59.76,107.96 v67.93,107.96 | v21.19,108.79 43.42,108.79 44.8,107.41 v44.94,107.34 | v61.15,23.68 61.15,19.95 v55.47,14.27 | 33.66,51.8 v34.49,50.97 | v33.66,54.5 33.66,51.8 | v10.04,45.91 13.02,45.91 v16.76,42.17 16.9,42.24 26.38,51.73 33.52,51.73 33.66,51.8 | v111.42,43.35 v118.76,36.01
32KHZ  (via drill 0.3)
  Top 0.15: 86.01,48.82 87.32,47.51 88.02,47.51 R2-PINH1.1 | 86.01,48.82 86.01,51.04 86.56,51.59 86.56,55.89 89.06,58.38 89.06,59.14 U3.1 | v41.2,43.49 29.92,43.49 25.35,48.06 18.84,48.06 18.14,47.37 18.14,47.09 U2.9 | v45.15,43.49 80.61,43.49 85.94,48.82 86.01,48.82
  Bottom 0.15: v45.15,43.49 v41.2,43.49
DN
  Top 0.15: 162.88,53.74 163.08,53.53 163.64,53.53 J2.B7 | 162.88,53.74 162.88,54.22 163.15,54.5 163.64,54.5 J2.A7 | 162.88,53.74 160.94,53.74 156.23,49.03 152.77,49.03 D1.4
DP
  Top 0.15: J2.A6 163.71,54.02 164.26,54.02 164.47,54.22 164.47,54.78 164.26,54.99 163.71,54.99 J2.B6 163.64,54.99 161.77,54.99 157.75,50.97 152.77,50.97 D1.6
EDP_3V3
  Top 0.3: C7.1 75.9,33.86 74.79,34.97 69.8,34.97 68.07,33.24 68.07,32.27 65.23,29.43 65.09,29.43 L1.2
EPD_3V3  (via drill 0.3)
  Top 0.3: J1.15 J1.16 66.89,14.34 v66.89,16.41 | Q2.2 59.07,26.39 57.62,24.93 57.62,22.58 60.25,19.95 62.67,19.95 EPD_C5.2 62.81,19.88 62.95,19.74 v63.57,19.74 | v70.08,12.19 71.26,11.01 77.84,11.01 84.62,4.23 90.37,4.23 TP_EPD_3V3.TP
  Bottom 0.3: v63.57,19.74 v66.89,16.41 66.97,16.27 70.08,13.16 v70.08,12.19
EPD_3V3_C  (via drill 0.3)
  Top 0.3: v54.43,14.27 54.15,13.99 54.15,13.37 R_CL1.1 | v59.9,27.98 59.42,27.98 59.14,28.25 Q2.1 | v20.64,65.72 20.64,64.61 U2.18 | v12.6,73.75 12.6,78.46 TP_EPD_3V3_C.TP
  Bottom 0.3: v54.43,14.27 59.9,19.74 v59.9,27.98 59.76,28.05 27.15,28.05 9.49,45.71 9.49,49.93 15.17,55.61 15.17,60.18 20.57,65.58 v20.64,65.72 v12.6,73.75
EPD_BUSY  (via drill 0.3)
  Top 0.15: v72.92,13.44 70.77,13.44 70.43,13.78 70.43,14.13 J1.9 | v92.93,4.16 94.32,4.16 TP_EPD_BUSY.TP | v20.91,67.52 13.16,67.52 10.53,64.89 10.53,64.61 U2.26
  Bottom 0.15: v92.93,4.16 83.65,13.44 v72.92,13.44 72.92,22.79 40.44,55.26 34.21,55.26 21.95,67.52 v20.91,67.52
EPD_CS  (via drill 0.3)
  Top 0.15: 12.43,79.95 12.12,79.64 6.79,79.64 5.61,78.46 TP_EPD_CS.TP | 12.43,79.95 17.04,84.55 17.04,95.08 13.78,98.34 12.19,98.34 D6.2 | v68.49,13.44 68.83,13.78 68.83,14.13 J1.12 | v33.79,26.73 33.1,26.73 33.03,26.8 R9.1 32.96,26.87 31.44,26.87 16.27,42.04 16.27,42.31 16.62,42.66 18,42.66 20.64,45.29 20.64,45.98 | 20.64,45.98 20.64,47.02 U2.11 | 20.64,45.98 v19.88,45.98 | v12.46,79.92 12.43,79.95
  Bottom 0.15: v68.49,13.44 67.86,13.44 67.45,13.85 55.68,13.85 55.61,13.78 49.51,13.78 36.56,26.73 v33.79,26.73 | v12.46,79.92 12.46,74.51 21.12,65.86 21.12,64.06 15.58,58.52 15.58,50.69 16.69,49.58 17.17,49.58 19.88,46.88 v19.88,45.98
EPD_DC  (via drill 0.3)
  Top 0.15: v69.39,17.04 J1.11 | v10.39,43.63 10.39,44.18 13.02,46.81 13.02,47.02 U2.5 | v7.13,46.81 7.13,64.82 2.42,69.53 2.42,78.32 TP_EPD_DC.TP
  Bottom 0.15: v69.39,17.04 69.39,19.18 67.8,20.78 67.8,21.68 68.14,22.02 68.42,22.02 71.53,18.91 71.53,12.19 70.29,10.94 43.07,10.94 v10.39,43.63 10.32,43.63 v7.13,46.81
EPD_RST  (via drill 0.3)
  Top 0.15: v68.9,18.14 69.87,17.17 69.87,14.2 J1.10 | v41.34,47.92 38.92,47.92 33.59,53.25 27.91,53.25 16.9,64.27 16.9,64.54 U2.21 16.76,64.61 16.76,64.89 v15.93,65.72 | v13.64,68 9.14,72.51 9.14,78.25 TP_EPD_RST.TP
  Bottom 0.15: v68.9,18.14 68.9,19.25 60.66,27.49 60.66,28.6 v41.34,47.92 | v15.93,65.72 v13.64,68
FLASH_CS  (via drill 0.3)
  Top 0.15: 36.25,37.92 31.44,42.73 26.04,42.73 21.95,46.81 21.95,47.02 U2.12 | 36.25,37.92 38.16,36.01 38.16,31.86 D9.2 | v8.03,88.71 8.03,99.44 R5.1 | v31.79,58.31 34.83,58.31 U1.1 | 36.25,37.92 44.18,45.84 v44.18,52.15
  Bottom 0.15: v8.03,88.71 8.03,88.3 24.52,71.81 24.52,65.58 v31.79,58.31 31.86,58.31 32.27,57.89 38.23,57.89 43.97,52.15 v44.18,52.15
GDR
  Top 0.15: 64.19,35.73 63.43,35.73 57.69,29.99 57.69,28.12 R4.2 | 64.19,35.73 76.45,35.73 76.87,35.32 76.87,19.67 73.96,16.76 73.96,14.2 J1.2 | 64.19,35.73 64.19,36.91 63.99,37.12 62.67,37.12 52.08,26.52 52.08,15.17 50.83,13.92 50.83,13.57 Q3.1
GND  (via drill 0.3)  (1 unrouted)
  Top 0.15: v48.48,101.73 IC1.3 | 50.69,103.53 51.11,103.53 C_DELAY.2 51.24,103.53 58.79,103.53 62.26,106.99 BOOT_BUTTON.1 62.12,107.06 65.51,107.06 BOOT_BUTTON.2 65.65,107.13 66.41,107.89 67.03,107.89 C5.2 67.1,108.03 68.42,109.35 78.18,109.35 79.78,107.75 84.14,107.75 TP_GND.TP | 50.69,103.53 v50.28,103.53 | C6.2 52.35,107.89 51.59,107.89 50.76,107.06 CHANGE_BUTTON.2 | CHANGE_BUTTON.1 47.23,107.06 50.69,107.06 CHANGE_BUTTON.2 | 50.69,103.53 50.69,106.99 CHANGE_BUTTON.2 | U2.29_1 12.4,53.12 12.4,54.29 U2.29_2 12.4,54.36 12.4,55.54 U2.29_3 | U2.29_4 13.71,53.12 13.71,54.29 U2.29_5 13.78,54.29 14.89,54.29 U2.29_8 | U2.29_7 14.89,53.12 13.78,53.12 U2.29_4 | U2.29_1 12.46,53.12 13.64,53.12 U2.29_4 | U2.1 7.96,47.09 7.96,49.79 11.29,53.12 12.33,53.12 U2.29_1 | U2.29_3 12.46,55.61 13.64,55.61 U2.29_6 13.71,55.61 14.89,55.61 U2.29_9 | 7.96,62.74 7.96,60.18 12.46,55.68 U2.29_3 | 7.96,62.74 7.96,64.54 U2.28 7.89,64.61 7.89,65.51 3.6,69.8 3.6,80.95 2.01,82.55 J4.G3 2.01,82.62 2.01,84.28 | 2.01,84.28 2.01,94.73 2.91,95.64 J4.G4 | D6.1 10.6,98.41 8.93,100.07 7.48,100.07 6.86,99.44 6.3,99.44 C9.1 6.23,99.38 4.85,97.99 4.85,93.49 5.47,92.87 5.61,92.87 J4.P6 | D6.1 10.66,98.41 11.36,99.1 14.06,99.1 22.02,107.06 22.23,107.06 RESET_BUTTON.1 22.3,107.06 25.76,107.06 RESET_BUTTON.2 25.83,107.06 26.8,108.03 27.35,108.03 C10.2 27.42,108.03 v28.05,107.41 | D6.1 10.66,98.34 10.66,97.85 16.2,92.31 16.2,91.27 J4.G2 16.2,91.2 15.37,90.37 15.37,87.39 16.2,86.56 16.2,85.59 J4.G1 16.14,85.59 14.82,84.28 2.01,84.28 | J2.A1 163.71,50.97 163.71,51.18 J2.B12 | J2.A1 163.71,50.9 163.71,49.65 164.19,49.17 J2.MP3
  Top 0.15: J2.MP1 168.14,49.17 164.26,49.17 J2.MP3 | U4.4 137.05,57.13 137.39,57.13 138.01,57.76 U4.9 | U4.1 137.05,58.52 137.32,58.52 137.95,57.89 U4.9 | U4.9 138.08,57.76 138.22,57.62 138.92,57.62 U4.6 138.99,57.55 143.69,57.55 148.95,62.8 149.32,62.8 149.72,62.4 | 164.19,58.1 164.19,59.35 J2.MP4 164.26,59.42 168.14,59.42 J2.MP2 | 164.19,58.1 163.71,57.62 J2.A12 163.71,57.55 163.71,57.34 J2.B1 163.64,57.27 163.08,57.27 162.11,56.3 155.88,56.3 R2-USB.2 155.81,56.3 149.72,62.4 | 164.19,58.1 164.68,58.1 165.37,57.41 165.37,51.11 165.02,50.76 163.78,50.76 J2.A1 | C2.2 161.7,5.2 163.15,5.2 C1.2 163.15,5.26 163.15,7.06 163.64,7.55 163.64,7.76 SENSOR2.5 163.64,7.83 163.64,8.03 163.15,8.52 162.53,8.52 | 162.53,8.52 162.04,8.03 162.04,7.83 SENSOR2.7 | 162.53,8.52 162.53,8.59 161.28,9.83 161.28,10.67 SENSOR2.1 161.21,10.73 161.21,15.58 163.5,17.87 164.47,17.87 J3.1 164.54,17.94 164.88,17.94 165.44,18.49 165.44,23.61 152.98,36.08 | IC4.2 123.06,36.98 128.81,36.98 129.08,37.26 C3.- 129.15,37.33 129.71,37.88 132.34,37.88 C1_BAT1.2 132.41,37.95 132.41,45.29 136.08,48.96 136.08,49.38 136.22,49.52 146.95,49.52 | 149.09,47.23 151.38,47.23 C5_USB.2 | 149.09,47.23 147.64,48.68 R2-USB1.1 147.57,48.75 146.95,49.38 146.95,49.52 | 148.96,40.17 149.09,40.3 149.09,41.55 151.66,44.11 151.66,45.08 C4_USB.2 | 148.96,40.17 147.23,40.17 147.09,40.3 147.09,45.15 149.09,47.16 149.09,47.23 | 146.95,49.52 146.95,50.48 147.09,50.62 148.13,50.62 148.75,50 150.2,50 D1.2 | 152.98,36.08 152.17,36.88 148.96,40.1 148.96,40.17 | J2.MP3 164.25,48.96 153,37.7 153,37.2 153,36.1 152.98,36.08
  Top 0.15: 36.77,54.5 36.98,54.5 38.78,56.3 U1.9 | 36.77,54.5 34.9,54.5 U1.4 | v36.77,48.89 36.01,48.13 D8.1 | 36.77,54.5 v36.77,54.02 | R2.1 48.34,10.46 48.34,7.62 SJ1.1 | 37.19,30.33 38.16,30.33 D9.1 38.23,30.26 48.27,20.22 48.27,12.9 | 37.19,30.33 35.94,30.33 D10.1 35.94,30.4 32.76,30.4 D11.1 | v36.49,37.05 36.49,32.55 37.19,31.86 37.19,30.33 | 93.35,51.11 94.6,51.11 95.08,51.59 C11.2 | 93.35,51.11 92.52,51.11 C8.2 | v85.59,51.25 85.32,50.97 85.32,49.86 U3.13 | v93.35,51.25 93.35,51.11 | R2_BAT.1 124.51,42.87 124.51,43.08 129.43,47.99 129.43,51.38 128.87,51.94 128.6,51.94 MCP73831.2 128.53,52.01 128.32,52.01 127.39,52.94 | 127.39,52.94 125.76,54.57 118.49,54.57 117.38,53.46 117.24,53.46 C1_BAT.2 117.17,53.39 v115.02,51.25 115.02,39.4 117.93,36.5 R1_PWRUSB.1 118,36.43 118,36.01 121.05,32.96 | 127.39,52.94 132.61,58.17 133.93,58.17 C2_BAT.2 134,58.24 142.31,66.55 149.65,66.55 150.41,65.79 150.41,64.82 149.72,64.13 149.72,62.4 | EPD_C12.1 56.44,16.14 55.19,16.14 EPD_C10.1 55.12,16.21 55.12,16.34 54.43,17.04 54.43,17.87 55.19,18.63 62.67,18.63 EPD_C5.1 62.74,18.7 64.4,18.7 EPD_C9.1 64.47,18.77 64.47,18.91 65.09,19.53 65.09,20.5 | 59.55,27.08 58.59,27.08 58.31,26.8 57.69,26.8 R4.1 | 59.55,27.08 59.76,26.87 59.76,24.52 58.45,23.2 D12.1 58.45,23.13 58.45,22.51 59,21.95 63.64,21.95 65.09,20.5 | D3.1 70.57,30.06 69.8,30.06 65.72,25.97 63.57,25.97 61.84,27.7 61.84,27.84 61.7,27.98 60.52,27.98 59.62,27.08 59.55,27.08 | 71.05,12.67 74.37,12.67 75.34,11.71 J1.MP1 75.41,11.71 110.59,11.71 | 71.05,12.67 69.94,12.67 68.97,11.71 61.91,11.71 J1.MP2 | J1.17 66.41,14.2 66.41,17.04 68.07,18.7 EPD_C7.1 68.14,18.77 69.6,18.77 69.73,18.91 EPD_C6.1 69.87,18.91 70.5,19.53
  Top 0.15: 70.5,20.64 70.36,20.78 67.8,20.78 67.45,20.43 67.45,20.01 66.34,18.91 66.34,18.77 EPD_C8.1 | 70.5,19.53 70.5,20.64 | 70.91,14.96 70.91,18.35 71.4,18.84 EPD_C2.1 71.33,18.91 70.7,19.53 70.5,19.53 | 70.91,14.96 70.91,14.2 J1.8 | 73.89,18.84 74.86,18.84 EPD_C11.1 74.86,18.91 76.59,20.64 76.59,34.28 75.97,34.9 75.97,35.11 C7.2 | 73.89,18.84 73.2,18.84 EPD_C1.1 | 70.5,20.64 70.7,20.64 70.84,20.78 73.61,20.78 73.89,20.5 73.89,18.84 | v71.05,12.47 71.05,12.67 | v71.05,14.96 70.91,14.96 | 65.09,20.5 65.3,20.5 66.34,21.54 v68.28,21.54 | 121.05,32.96 122.23,32.96 122.92,33.66 C1_BAT2.2 | 110.59,11.71 110.59,23.34 119.95,32.7 120.44,32.7 120.7,32.96 121.05,32.96 | 110.59,11.71 110.59,4.43 TP4.TP | v49.93,11.43 48.27,11.43 | 7.96,62.74 10.18,62.74 20.91,52.01 v34.21,52.01
  Top 0.152: 48.27,11.5 47.9,11.87 47.9,12.2 48.27,12.57 48.27,12.9 | R2.1 48.27,10.53 48.27,10.8 47.87,11.2 47.87,11.23 47.85,11.25 48.03,11.43 48.27,11.43
  Bottom 0.15: v50.28,103.53 v48.48,101.73 33.73,101.73 v28.05,107.41 | v36.77,54.02 36.77,52.01 | 36.77,52.01 v36.77,48.89 36.77,37.33 v36.49,37.05 | v85.59,51.25 v93.35,51.25 v115.02,51.25 | v68.28,21.54 71.05,18.77 v71.05,14.96 v71.05,12.47 71.05,12.12 70.36,11.43 v49.93,11.43 | 36.77,52.01 v34.21,52.01
GPIO8
  Top 0.15: R1.2 17.66,43.42 17.66,45.15 19.32,46.81 19.32,47.02 U2.10
GROUND_BOT
  pour Bottom: 78.18,9.72 78.18,9.58 78.32,9.58 78.34,9.56 78.36,9.54 78.38,9.52 78.38,-0.62 170.52,-0.62 170.52,67.32 169.78,67.32 169.76,67.34 169.74,67.36 169.72,67.38 169.72,111.32 -0.02,111.32 -0.02,-0.52 59.82,-0.52 59.82,9.72 59.84,9.74 59.86,9.76 59.88,9.78 78.12,9.78 78.14,9.76 78.16,9.74
GROUND_TOP
  pour Top: 170.32,-0.32 170.32,67.12 92.68,67.12 92.66,67.14 92.64,67.16 92.62,67.18 92.62,111.42 -0.02,111.42 -0.02,-0.42 60.02,-0.42 60.02,10.12 60.04,10.14 60.06,10.16 60.08,10.18 60.12,10.18 60.14,10.16 60.16,10.14 60.18,10.12 60.18,9.78 78.42,9.78 78.44,9.76 78.46,9.74 78.48,9.72 78.48,9.68 78.46,9.66 78.44,9.64 78.42,9.62 78.18,9.62 78.18,-0.32
I2C_PW  (via drill 0.3)
  Top 0.15: 161.77,7 161.28,7.48 161.28,7.76 SENSOR2.8 | 161.77,7 162.32,7 162.81,7.48 162.81,7.76 SENSOR2.6 | 160.6,4.98 161.63,3.95 C2.1 161.7,3.88 C1.1 163.16,4.09 164.11,5.05 | 160.6,4.98 160.59,4.99 159.9,4.99 R2-PINH.2 | R1_PINH.2 165.09,5.02 164.96,4.89 164.36,4.89 164.2,5.05 164.11,5.05 | v25,65.72 22.78,65.72 21.95,64.89 21.95,64.61 U2.17 | v161.7,11.57 161.7,11.01 161.98,10.73 SENSOR2.2 162.04,10.67 162.04,10.38 164.11,8.32 164.11,5.05 | 160.6,4.98 160.99,5.36 160.99,6.21 161.77,6.99 161.77,7
  Bottom 0.15: v25,65.72 32.55,58.17 78.05,58.17 124.65,11.57 v161.7,11.57
INT_RTC  (via drill 0.3)
  Top 0.15: U2.8 16.9,47.09 16.9,47.44 17.8,48.34 25.48,48.34 30.05,43.77 38.5,43.77 43.7,48.96 43.7,52.28 46.26,54.85 82.55,54.85 86.49,58.79 U3.3 86.56,58.79 87.46,57.89 88.16,57.89 88.5,58.24 88.5,61.63 R1_PINH1.1 88.5,61.7 v87.88,62.33 | v77.77,72.44 77.77,108.03 TP_INT_RTC.TP
  Bottom 0.15: v87.88,62.33 v77.77,72.44
IO/BOOT  (via drill 0.3)
  Top 0.15: BOOT_BUTTON.3 62.12,108.59 BOOT_BUTTON.4 62.05,108.52 59.62,108.52 58.7,107.59 58.7,107.02 59,106.72 | 59,106.72 60.73,106.72 R_BOOT.1 | 59,106.72 52.42,106.72 C6.1 52.35,106.65 v52.35,104.98 | v25.62,65.72 24.52,64.61 U2.15
  Bottom 0.15: v25.62,65.72 25.62,78.25 v52.35,104.98
IO/CHANGE
  Top 0.15: CHANGE_BUTTON.3 50.69,108.59 47.23,108.59 CHANGE_BUTTON.4 47.16,108.52 45.08,108.52 44.1,107.53 44.1,107.02 44.4,106.72 | 44.4,106.72 45.57,106.72 R_CHANGE.1 | 44.4,106.72 27.42,106.72 C10.1 27.42,106.65 27.42,73.41 21.05,67.03 16.48,67.03 14.34,64.89 14.34,64.61 U2.23
MISO  (via drill 0.3)
  Top 0.15: v25.35,57.06 34.83,57.06 U1.2 | v16.48,57.06 9.21,64.33 9.21,64.54 U2.27 9.14,64.61 9.14,64.89 v7.06,66.97 | v7.06,92.8 5.96,93.9 5.82,93.9 J4.P7 | v37.6,26.94 36.29,26.94 R8.1 | v59.14,22.44 59.83,23.13 D12.2 59.97,23.2 v74.51,23.2 | v99.72,4.23 102.49,4.23 TP_MISO.TP
  Bottom 0.15: v16.48,57.06 v25.35,57.06 | v7.06,92.8 v7.06,66.97 7.06,47.58 27.42,27.22 37.26,27.22 37.53,26.94 v37.6,26.94 54.64,26.94 v59.14,22.44 | v99.72,4.23 93.49,4.23 v74.51,23.2
MOSI  (via drill 0.3)
  Top 0.15: v58.1,12.88 66.97,12.88 67.86,13.78 67.86,14.13 J1.14 | 38.5,26.25 38.5,26.94 R7.1 | 38.5,26.25 v38.5,24.17 | v39.75,22.92 39.75,28.05 38.92,28.88 32.96,28.88 31.99,29.85 31.99,30.96 32.69,31.65 32.69,31.86 D11.2 | 16.83,48.61 25.62,48.61 30.19,44.04 38.36,44.04 42.66,48.34 42.66,54.43 U1.5 | 16.83,48.61 15.58,47.37 15.58,47.09 U2.7 15.51,47.02 15.51,46.81 12.86,44.16 7.62,38.92 2.84,38.92 TP_MOSI.TP | v9.28,86.01 9.28,86.84 6.58,89.54 J4.P3 | v9.28,62.26 15.3,56.23 15.37,56.23 16.55,55.05 16.55,48.96 16.83,48.68 16.83,48.61 | 38.5,26.25 30.18,26.25 12.91,43.51
  Top 0.152: 12.91,43.51 12.91,44.11 12.86,44.16
  Bottom 0.15: v58.1,12.88 49.79,12.88 v39.75,22.92 v38.5,24.17 | v9.28,62.26 v9.28,86.01
N$1
  Top 0.15: 70.5,31.37 70.5,34.28 D4.1 | 70.5,31.37 70.5,31.3 65.93,26.73 65.3,26.73 C4.1 | D3.2 74.03,30.12 71.81,30.12 70.57,31.37 70.5,31.37
N$2
  Top 0.15: J1.24 62.88,14.2 59.97,14.2 56.78,17.38 56.51,17.38 EPD_C12.2
N$3
  Top 0.15: R2-USB1.2 147.64,50 148.06,50 149.58,48.48 156.09,48.48 160.59,52.98 163.64,52.98 J2.A5
N$4
  Top 0.15: R2-USB.1 155.88,54.99 161.35,54.99 162.32,55.95 163.64,55.95 J2.B5
N$6
  Top 0.15: D2.1 120.5,35.46 122.43,35.46 122.99,36.01 IC4.3 | IC4.1 122.99,37.88 122.85,37.88 122.3,37.33 122.3,36.63 122.92,36.01 IC4.3 | IC4.3 123.06,36.08 123.2,36.08 123.68,36.56 126.31,36.56 126.8,36.08 130.33,36.08 130.81,36.56 132.34,36.56 C1_BAT1.1 132.41,36.63 136.7,40.93 136.7,48.82 Q1.2
N$8
  Top 0.15: R_CAPACITOR.1 92.8,60.04 90.37,60.04 89.12,61.29 89.12,62.4 D7.1
N$9
  Top 0.15: J1.22 63.85,14.13 63.85,13.78 63.64,13.57 60.18,13.57 56.92,16.83 55.75,16.83 55.19,17.38 EPD_C10.2
N$11
  Top 0.15: J1.20 64.96,14.2 64.96,17.66 65.65,18.35 65.65,19.32 66.27,19.95 EPD_C8.2
N$12
  Top 0.15: J1.19 65.44,14.2 65.44,16.69 67.45,18.7 67.45,19.32 68.07,19.95 EPD_C7.2
N$13  (via drill 0.3)
  Top 0.15: v66.34,13.37 65.93,13.78 65.93,14.13 J1.18 | v68.97,20.22 69.8,20.22 EPD_C6.2
  Bottom 0.15: v66.34,13.37 67.52,13.37 69.18,11.71 70.22,11.71 70.57,12.05 70.57,18.63 v68.97,20.22
N$15
  Top 0.15: J1.5 72.37,14.2 72.37,18.07 72.09,18.35 72.09,19.53 71.47,20.15 EPD_C2.2
N$16
  Top 0.15: C_DELAY.1 51.11,102.28 50.83,102.28 49.51,103.6 IC1.5
N$17
  Top 0.15: J1.4 72.85,14.2 72.85,18.01 72.5,18.35 72.5,19.46 73.13,20.08 EPD_C1.2
N$18
  Top 0.15: R2_BAT.2 124.51,44.18 124.51,49.58 125.97,51.04 MCP73831.5
N$20
  Top 0.15: CHG_LED.C 121.6,53.39 121.6,50.83 R1_BAT.1
N$21
  Top 0.15: R1_BAT.2 122.99,50.83 124.58,50.83 125.27,51.52 127.83,51.52 128.25,51.11 128.53,51.11 MCP73831.1
PREVGH
  Top 0.15: J1.21 64.33,14.13 64.33,13.78 63.85,13.3 58.31,13.3 56.02,15.58 54.57,15.58 54.15,16 54.15,18.01 55.4,19.25 57.5,19.25 63.71,19.25 64.4,19.95 EPD_C9.2 | 56.99,20.2 56.99,29.71 63.29,36.01 63.29,36.43 D5.1
  Top 0.152: 57.5,19.25 56.99,19.76 56.99,20.2
PREVGL
  Top 0.15: 73.96,21.05 66.27,21.05 65.37,20.15 65.37,18.49 63.43,16.55 63.43,14.2 J1.23 | 73.96,21.05 74.86,20.15 EPD_C11.2 | D4.2 74.03,31.44 75,30.47 75,22.16 73.96,21.12 73.96,21.05
RESE  (via drill 0.3)
  Top 0.15: 54.5,14.75 53.32,14.75 52.15,13.57 Q3.2 | 54.5,14.75 55.61,14.75 57.96,12.4 66.89,12.4 67.45,12.95 73.06,12.95 73.41,13.3 73.41,14.13 J1.3 | v54.5,26.45 55.88,27.84 55.88,28.05 R3.2 | 54.5,14.75 v54.5,15.1
  Bottom 0.15: v54.5,15.1 v54.5,26.45
RESE`
  Top 0.15: SJ1.2 49.79,7.62 49.65,7.76 49.65,10.46 R2.2 49.65,10.53 51.24,12.12 51.24,13.78 52.35,14.89 52.35,16.62 55.88,20.15 55.88,26.73 R3.1
RESET  (via drill 0.3)
  Top 0.15: R_RESET.1 20.64,106.78 20.64,106.99 22.23,108.59 RESET_BUTTON.4 25.76,108.59 RESET_BUTTON.3 25.83,108.59 26.8,108.59 26.87,108.65 41.62,108.65 v43.07,107.2 | 50.62,101.66 50,102.28 49.72,102.28 48.41,103.6 46.67,103.6 IC1.1 46.6,103.67 v45.98,104.29 | 50.62,101.66 62.05,101.66 67.03,106.65 C5.1 | v10.53,51.73 10.53,47.09 U2.3 | v19.32,66.27 19.74,66.27 20.22,66.76 21.19,66.76 50.62,96.19 50.62,101.66
  Bottom 0.15: v10.53,51.73 10.53,57.48 v19.32,66.27 | v45.98,104.29 v43.07,107.2
RTC_RST
  Top 0.15: U2.16 23.2,64.54 23.2,58.59 28.25,53.53 40.79,53.53 42.38,55.12 81.58,55.12 85.25,58.79 85.25,59.14 U3.4
RX  (via drill 0.3)
  Top 0.15: v17.66,59.69 13.09,64.27 13.09,64.54 U2.24 | v27.49,59.69 50.62,59.69 v52.63,57.69 | v105.33,4.99 105.81,4.99 106.51,4.29 TP_RX.TP
  Bottom 0.15: v27.49,59.69 v17.66,59.69 | v105.33,4.99 v52.63,57.69
SCK  (via drill 0.3)
  Top 0.15: TP_SCK.TP 2.49,43.14 10.6,43.14 14.27,46.81 14.27,47.02 U2.6 14.27,47.16 14.27,49.03 v16.07,50.83 | v68.35,17.87 68.35,14.2 J1.13 | v36.7,31.02 35.94,31.79 D10.2 | v38.23,44.53 34.56,48.2 R6.1 | v40.86,54.22 42.31,55.68 42.66,55.68 U1.6 | v7.55,90.17 6.03,91.69 5.82,91.69 J4.P5
  Bottom 0.15: v68.35,17.87 68.35,19.39 60.39,27.36 60.39,28.12 57.48,31.02 38.23,31.02 | v36.7,31.02 38.23,31.02 | 38.23,31.02 v38.23,44.53 38.23,44.6 40.86,47.23 v40.86,54.22 40.79,54.22 40.03,54.99 32.83,54.99 28.64,59.17 | v7.55,90.17 7.55,88.36 20.43,75.48 20.43,67.38 28.64,59.17 | v16.07,50.83 20.29,50.83 28.64,59.17
SCL  (via drill 0.3)
  Top 0.15: R2-PINH.1 159.9,3.67 160.73,3.67 161.28,3.12 165.65,3.12 166.06,3.53 166.06,8.31 163.71,10.67 SENSOR2.4 163.71,10.73 v163.71,17.17 | v140.23,58.03 138.99,58.03 U4.7 | 163.74,21.64 164.47,20.91 J3.4 | 163.74,21.64 v140.23,45.15 | v163.71,21.61 163.74,21.64 | v69.87,66.69 69.67,66.48 20.36,66.48 19.67,65.79 19.04,65.79 18.14,64.89 18.14,64.61 U2.20 | v87.05,52.35 89.06,50.35 89.06,49.86 U3.16
  Bottom 0.15: v140.23,45.15 v140.23,58.03 140.23,58.66 139.88,59 93.76,59 87.12,52.35 v87.05,52.35 72.71,66.69 v69.87,66.69 | v163.71,21.61 v163.71,17.17
SDA  (via drill 0.3)
  Top 0.15: R1_PINH.1 165.16,3.74 165.16,3.95 165.78,4.57 165.78,7.48 162.88,10.39 162.88,10.67 SENSOR2.3 162.88,10.73 v162.88,16.62 | v139.75,58.52 138.99,58.52 U4.8 | v139.75,44.32 164.12,19.95 164.47,19.95 J3.3 163.84,20.15 v163.22,19.53 | v70.22,66.2 20.5,66.2 19.39,65.1 19.39,64.61 U2.19 | v87.05,51.73 87.05,50.97 87.81,50.21 87.81,49.86 U3.15
  Bottom 0.15: v139.75,44.32 139.75,51.73 | 139.75,51.73 v139.75,58.52 | v162.88,16.62 162.88,19.18 v163.22,19.53 | v70.22,66.2 72.57,66.2 v87.05,51.73 139.75,51.73
SRC  (via drill 0.3)
  Top 0.15: C4.2 63.99,26.73 63.99,27.01 62.19,28.81 62.19,31.09 65.03,33.93 L1.1 65.03,34 v65.03,35.25 | 65.03,37.4 65.93,37.4 66.83,36.5 D5.2 | 65.03,37.4 62.53,37.4 51.45,26.32 51.45,15.65 Q3.3 | 65.03,37.4 v65.03,36.91
  Bottom 0.15: v65.03,36.91 v65.03,35.25
SS_SD  (via drill 0.3)
  Top 0.15: R10.1 53.25,8.31 52.91,8.31 50.69,6.09 33.86,6.09 1.25,38.71 1.25,43.63 3.05,45.43 10.32,45.43 11.7,46.81 11.7,47.02 U2.4 11.77,47.16 11.77,47.37 v13.5,49.1 | D8.2 35.94,49.58 35.66,49.58 35.04,48.96 17.17,48.96 v17.04,49.1 17.04,54.99 9.9,62.12 v9.9,62.26 | v9.9,84.76 J4.P2
  Bottom 0.15: v13.5,49.1 v17.04,49.1 | v9.9,62.26 v9.9,84.76
TX  (via drill 0.3)
  Top 0.15: v16.9,59.21 11.77,64.33 11.77,64.54 U2.25 | v27.98,59.21 43.35,59.21 v46.47,56.09 | v97.3,5.26 98.27,4.29 TP_TX.TP
  Bottom 0.15: v27.98,59.21 v16.9,59.21 | v97.3,5.26 v46.47,56.09
USB_D+  (via drill 0.3)
  Top 0.15: v137.74,50.9 150.2,50.9 D1.1 | v108.72,44.32 93,44.32 86.36,37.67 v37.74,37.67 | v25.28,46.26 24.52,47.02 U2.14
  Bottom 0.15: v137.74,50.9 115.3,50.9 v108.72,44.32 | v37.74,37.67 36.63,36.56 34.97,36.56 v25.28,46.26
USB_D-  (via drill 0.3)
  Top 0.15: v149.23,49.45 149.65,49.03 150.2,49.03 D1.3 | v92.45,44.39 81.92,44.39 80.54,43 v41.97,43 | v38.71,43 27.01,43 23.2,46.81 23.2,47.02 U2.13
  Bottom 0.15: v149.23,49.45 145.49,49.45 139.88,43.84 93,43.84 v92.45,44.39 | v38.71,43 v41.97,43
VBAT
  Top 0.15: 135.73,52.98 135.73,55.12 134.93,55.92 | 135.73,52.98 135.73,50.97 Q1.3 | 134.93,55.92 134,56.86 C2_BAT.1 | 134.93,55.92 136.63,57.62 136.91,57.62 U4.3 136.98,57.62 136.98,58.03 U4.2 136.91,58.03 136.7,58.03 136.35,58.38 136.35,58.72 142.86,65.23 149.09,65.23 TP_VBAT.TP | 135.73,52.98 128.6,52.98 MCP73831.3
VBUS  (via drill 0.3)
  Top 0.3: 152.77,46.33 152.77,45.36 152.97,45.15 C4_USB.1 152.9,45.01 152.9,42.52 152.63,42.24 PFMF.050.1.2 | 152.77,46.33 152.77,47.16 C5_USB.1 | 151.17,51.52 151.17,59.07 149.09,61.15 TP_VBUS.TP | 151.17,51.52 151.17,51.18 152.35,50 152.7,50 D1.5 152.28,49.86 v151.8,49.38 | v152.63,46.33 152.77,46.33 | CHG_LED.A 123.13,53.39 125.55,53.39 125.97,52.98 MCP73831.4 | C1_BAT.1 118.56,53.46 120.36,53.46 121.05,54.16 122.36,54.16 122.99,53.53 CHG_LED.A | R1_PWRUSB.2 118,37.74 120.22,37.74 120.43,37.53 D2.2 120.56,37.6 122.93,39.97 | 122.93,39.97 131.78,48.82 134.76,48.82 Q1.1 134.9,48.82 137.6,51.52 151.17,51.52 | CHG_LED.A 123.06,53.25 123.06,52.22 122.3,51.45 122.3,41.6 122.93,40.97 122.93,39.97
  Bottom 0.3: v152.63,46.33 152.63,48.55 v151.8,49.38
VRTC
  Top 0.3: C11.1 95.08,49.45 94.8,49.72 92.52,49.72 C8.1 92.38,49.86 91.76,50.48 | 91.76,50.48 91.76,51.59 93.63,53.46 93.63,60.53 R_CAPACITOR.2 | U3.14 86.56,49.79 86.56,49.38 87.46,48.48 89.68,48.48 91.62,50.41 91.76,50.48
VUSB
  Top 0.3: J2.A9 163.71,56.79 163.71,56.58 J2.B4 163.84,56.51 164.33,56.51 164.88,55.95 164.88,52.56 164.4,52.08 163.84,52.08 J2.B9 163.71,52.01 163.71,51.73 J2.A4 163.57,51.66 159.83,51.66 156.09,47.92 152.21,47.92 152.07,47.78 152.07,46.61 151.31,45.84 151.17,45.84 148.13,42.8 148.13,42.24 PFMF.050.1.1